# Altium PCB Vertical.PcbDoc
Units mm, origin at the board's own origin, x right, y up, seen from the top; angles counter-clockwise.
Board outline 123.6 x 63.6 mm, 4 copper layers (Top Layer, Internal Plane 1, Internal Plane 2, Bottom Layer), stack 0.462 mm thick; 3 components, 40 nets, 104 pads, 10 vias.
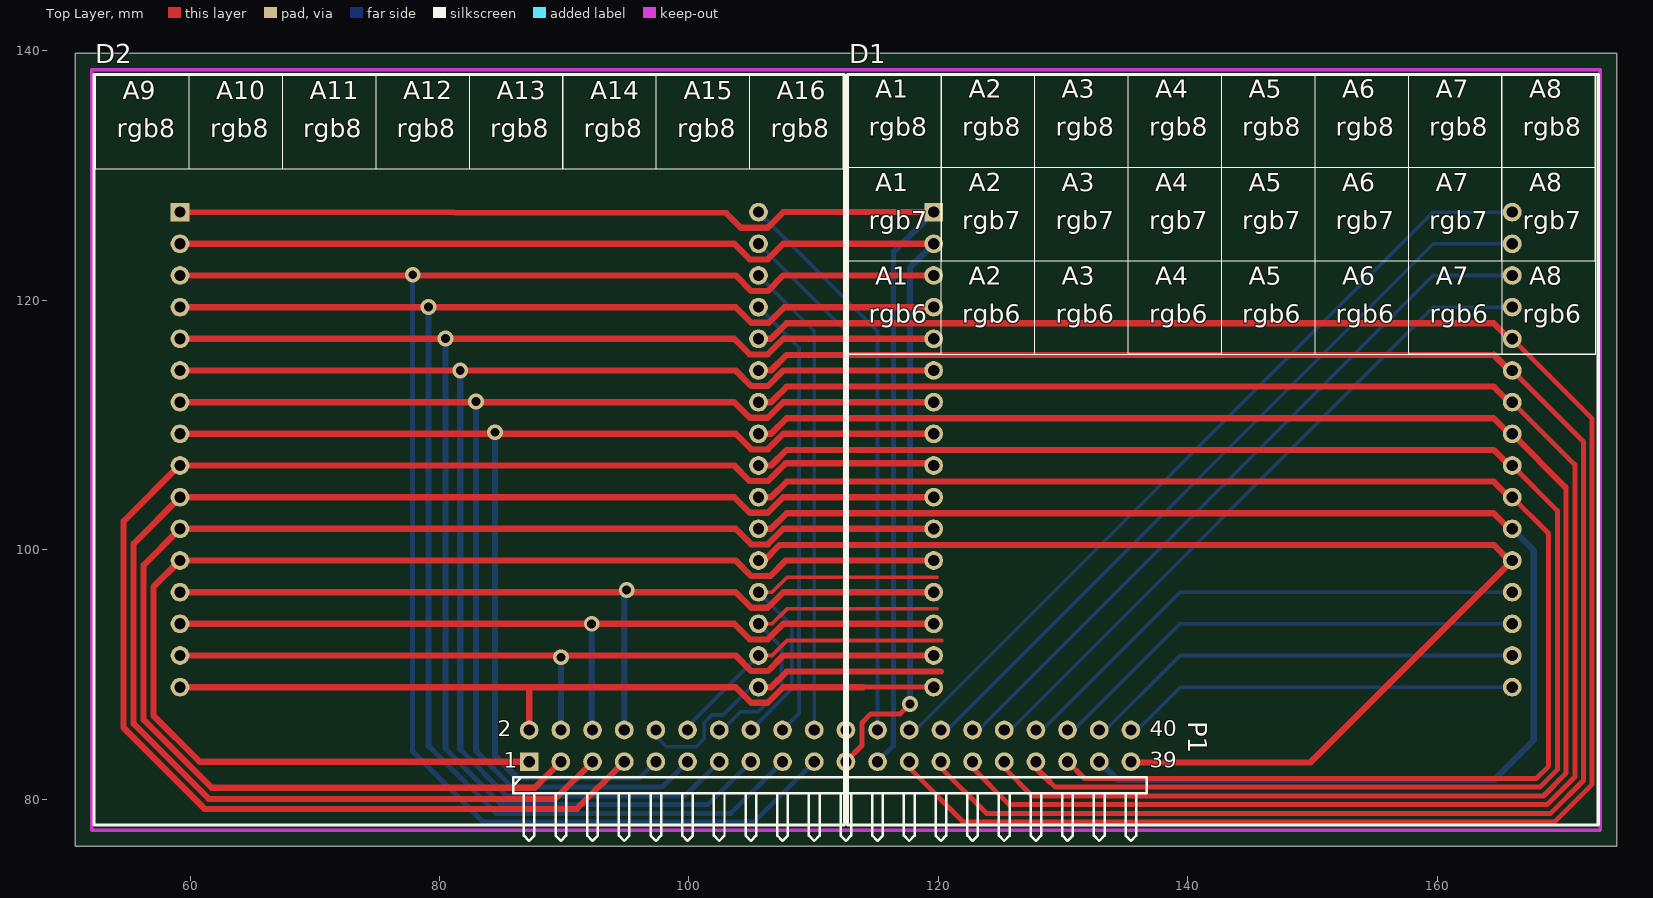
[diagram p0: Top Layer view]
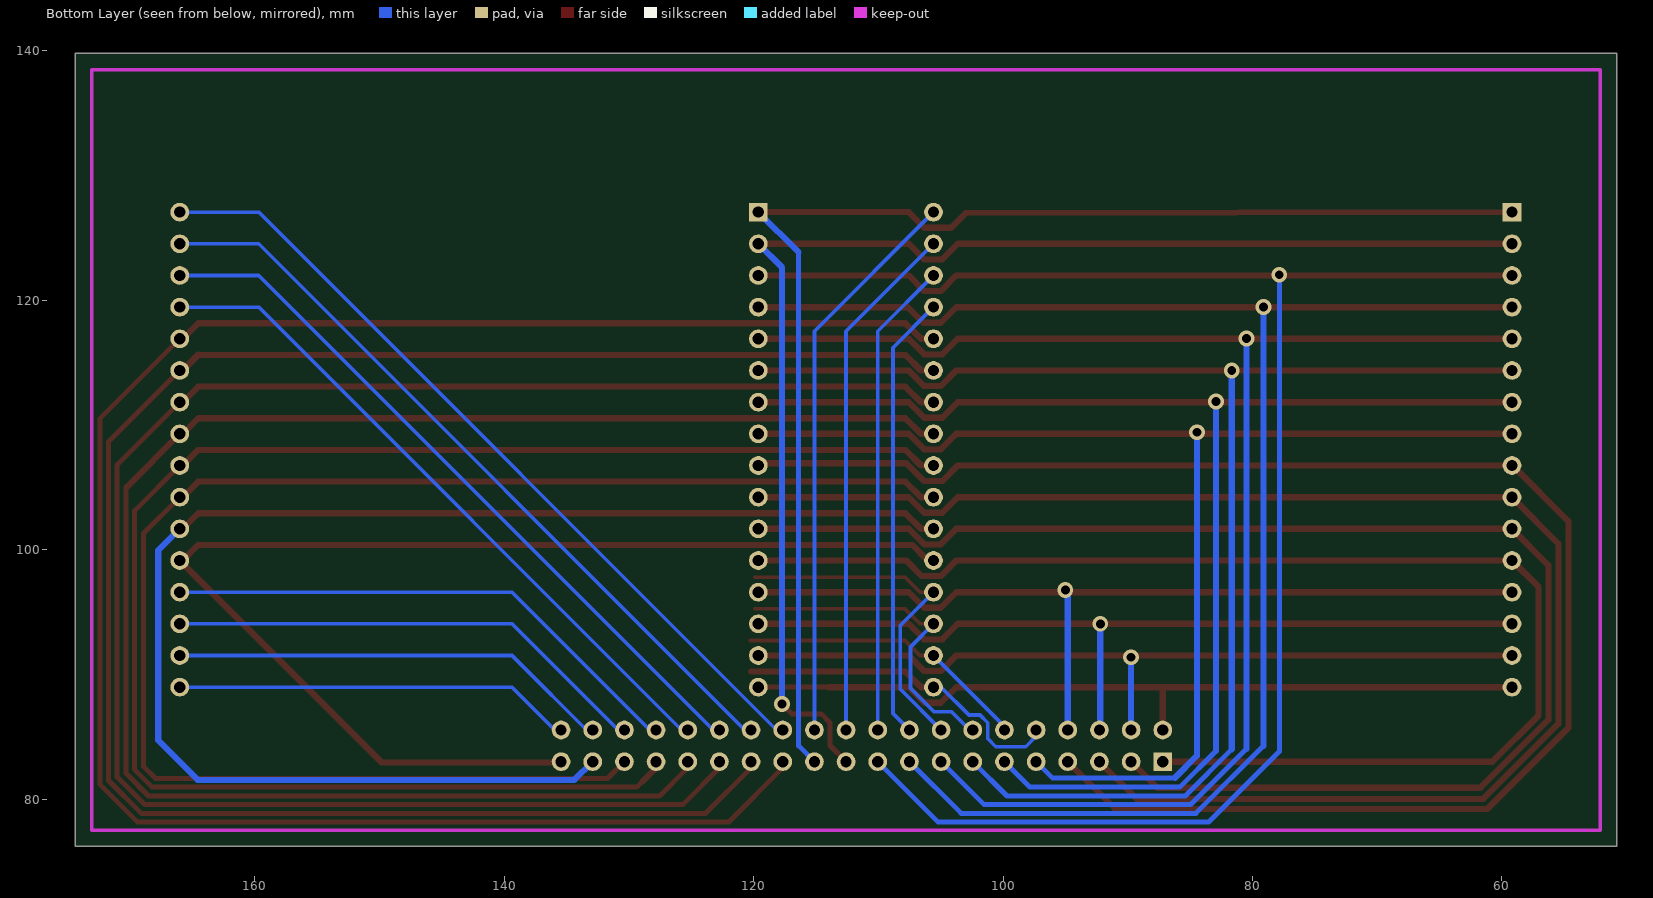
[diagram p1: Bottom Layer view, seen from below]
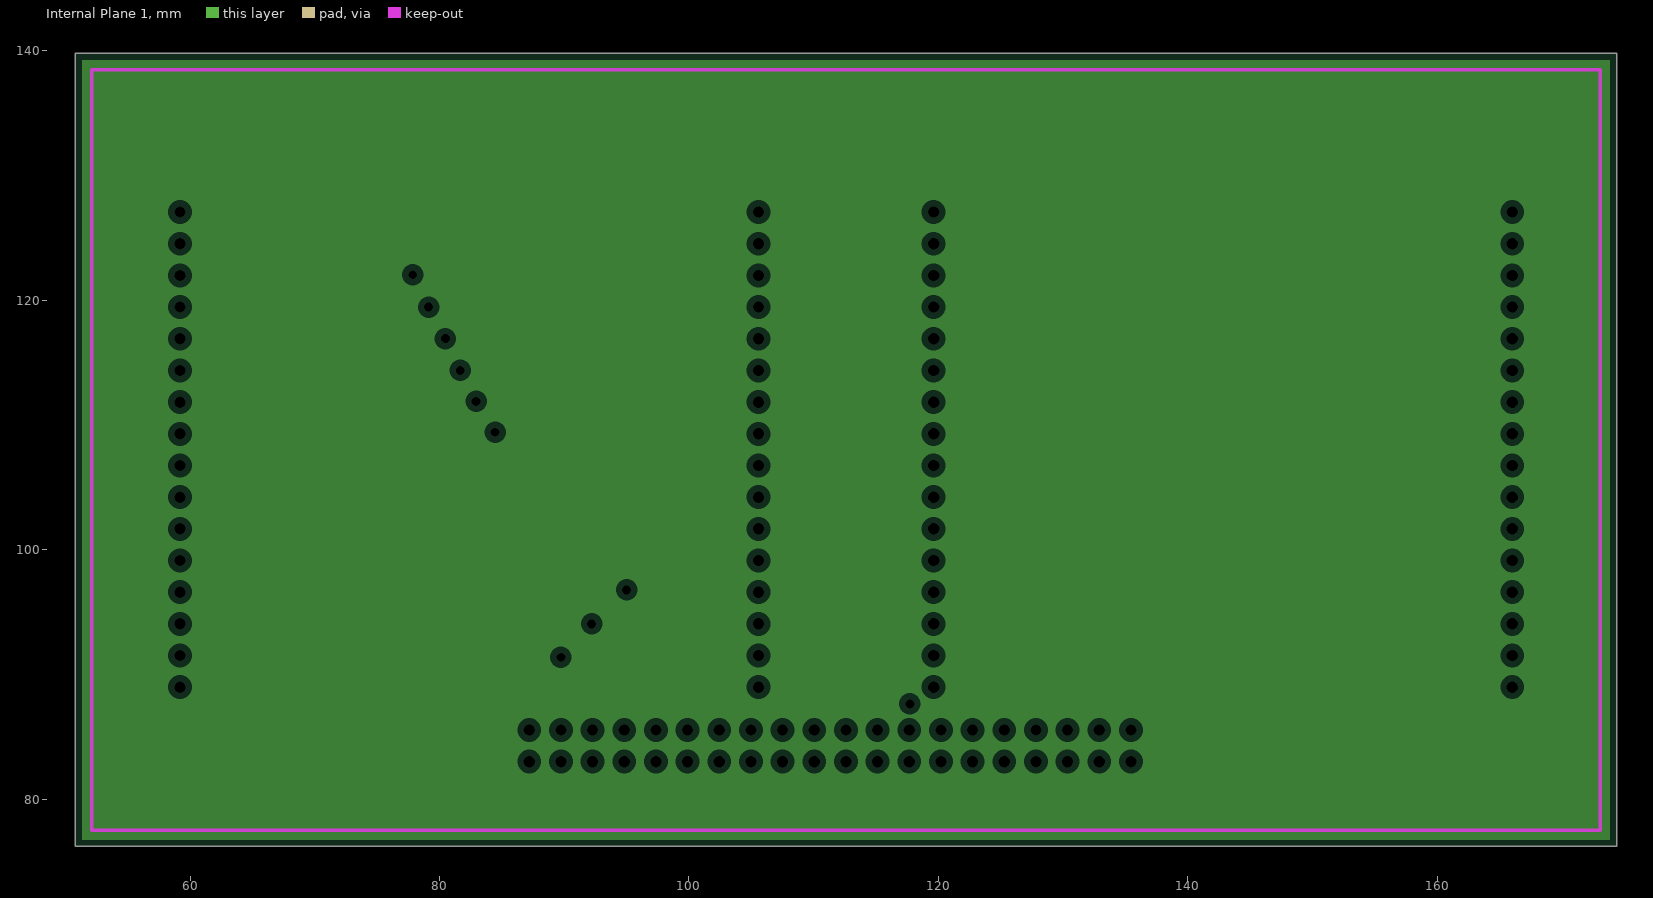
[diagram p2: Internal Plane 1, clearances drawn from the general rule]
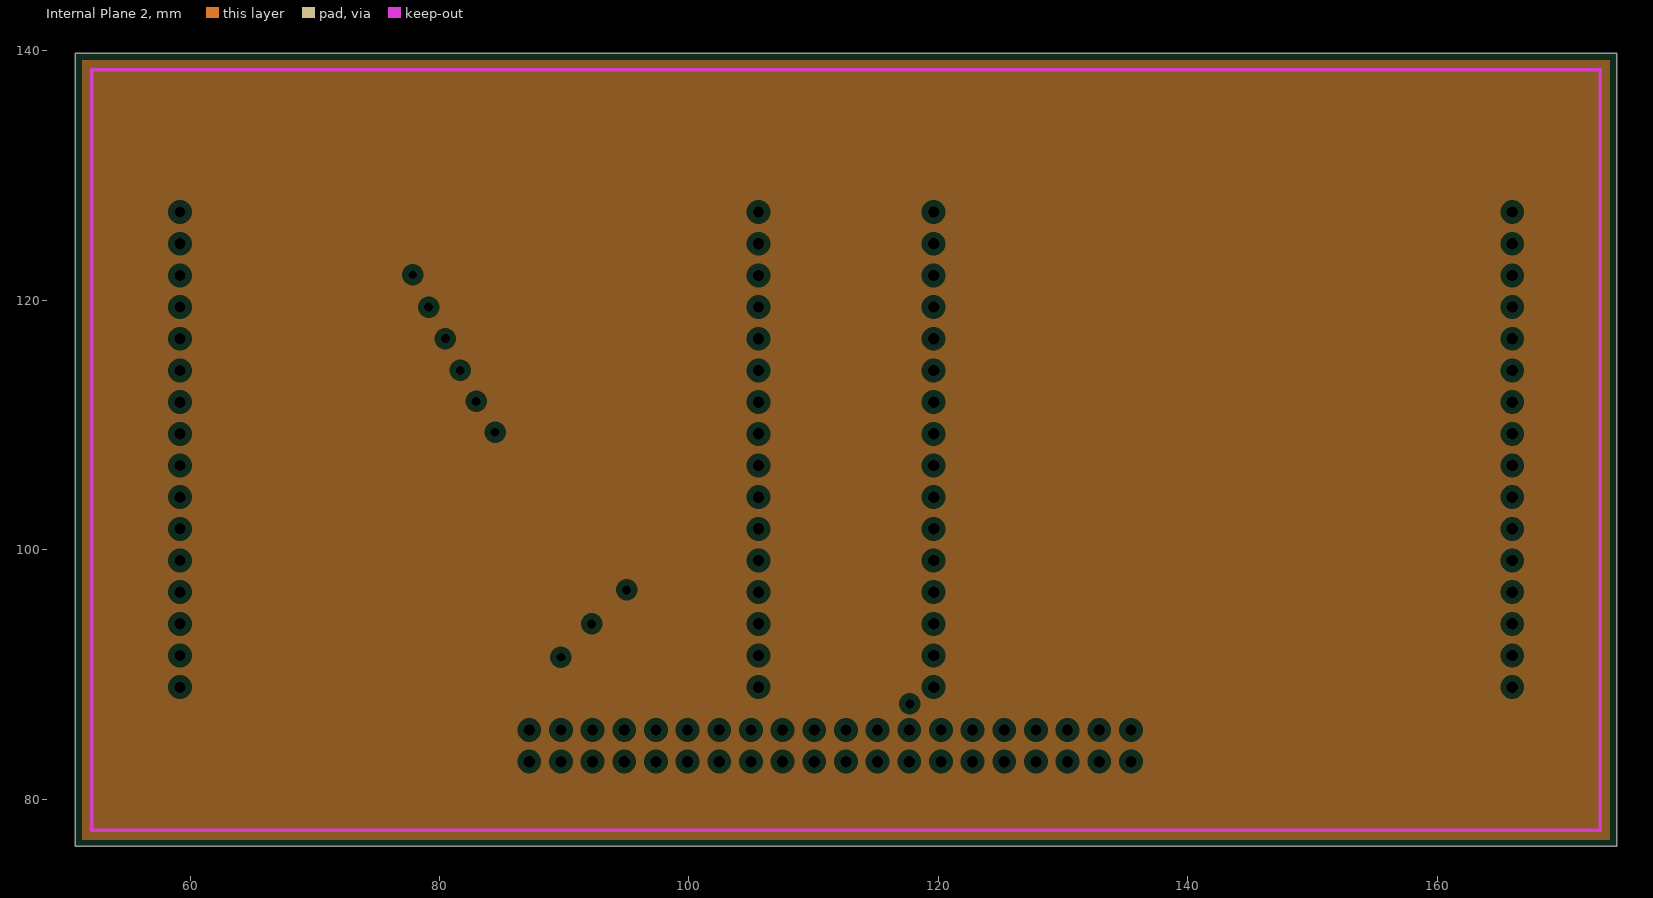
[diagram p3: Internal Plane 2, clearances drawn from the general rule]

## Layer stack, top to bottom
Top Solder: solder mask 0.0102, Solder Resist, Dk 3.5
Top Layer: signal copper 0.0356
Internal Plane 1: plane copper 0.0356
Internal Plane 2: plane copper 0.0356
Dielectric 1: dielectric 0.32, FR-4, Dk 4.8
Bottom Layer: signal copper 0.0356
Bottom Solder: solder mask 0.0102, Solder Resist, Dk 3.5

## Board outline
50.8,76.2 174.4,76.2 174.4,139.8 50.8,139.8

## Design rules (kind name [scope] priority, off if disabled: settings)
Clearance [All] p1: gap=0.3 ignorepadtopadclearanceinfootprint=FALSE except(0: Arc-Hole Track-Hole SMDPad-Hole THPad-Hole Via-Hole Fill-Hole Poly-Hole Region-Hole Text-Hole)
PlaneClearance [All] p1: clearance=0.508
PlaneConnect [All] p1: planeconnectstyle=Relief reliefexpansion=0.508 reliefentries=4 reliefconductorwidth=0.254 reliefairgap=0.254
PolygonConnect [All] p1: connectstyle=Relief reliefconductorwidth=0.254 reliefentries=4 polygonreliefangle="90 Angle" airgapwidth=0.254
RoomDefinition Sheet1 [InComponentClass('Sheet1')] p1: confinementstyle=ConfineIn formatcopy=TRUE lockcomponents=FALSE outline 0,0 50.8,0 50.8,25.4 0,25.4
RoutingVias [All] p1: holewidth=0.8 width=1.6 viastyle="Through Hole" minholewidth=0.711 minwidth=1.27 maxholewidth=0.711 maxwidth=1.27
SolderMaskExpansion [All] p1: expansion=0.102 istentingtop=FALSE
Width [All] p1: maxlimit=1 minlimit=0.3 preferedwidth=0.5
28 further rules are at their usual default settings.

## Components (designator, comment, footprint, x,y, rotation, side; value= is the part's Value field where it differs from the comment)
D1 "Dot_Matrix_RGB" Dot_Matrix_RGB 142.832,108.024 r0 top locked
D2 "Dot_Matrix_RGB" Dot_Matrix_RGB 82.384,108.024 r0 top locked
P1 "Header 20X2H" HDR2X20H 87.192,83 r0 top locked

## Footprints (in the part's own frame and the unit in brackets; to place one, negate y for a bottom-side part, rotate by r counter-clockwise, add the part's x,y. Pads: shape width x height; smd on the part's side, far side on the other; paste and mask are expansions set on the pad)
Dot_Matrix_RGB [mm]
  rect 1.5x1.5 hole 0.9: 1(-23.2,19.05)
  round 1.5 hole 0.9: 2(-23.2,16.51) 3(-23.2,13.97) 4(-23.2,11.43) 5(-23.2,8.89) 6(-23.2,6.35) 7(-23.2,3.81) 8(-23.2,1.27) 9(-23.2,-1.27) 10(-23.2,-3.81) 11(-23.2,-6.35) 12(-23.2,-8.89) 13(-23.2,-11.43) 14(-23.2,-13.97) 15(-23.2,-16.51) 16(-23.2,-19.05) 17(23.2,-19.05) 18(23.2,-16.51) 19(23.2,-13.97) 20(23.2,-11.43) 21(23.2,-8.89) 22(23.2,-6.35) 23(23.2,-3.81) 24(23.2,-1.27) 25(23.2,1.27) 26(23.2,3.81) 27(23.2,6.35) 28(23.2,8.89) 29(23.2,11.43) 30(23.2,13.97) 31(23.2,16.51) 32(23.2,19.05)
  silkscreen extent -30.1,-30.1 30.1,30.1, body extent -30.2,-30 29.8,30, height 7
HDR2X20H [mm] "Connector; Header; 20x2 Position; Right Angle"
  rect 1.5x1.5 hole 0.9: 1(0,0)
  round 1.5 hole 0.9: 2(0,2.54) 3(2.54,0) 4(2.54,2.54) 5(5.08,0) 6(5.08,2.54) 7(7.62,0) 8(7.62,2.54) 9(10.16,0) 10(10.16,2.54) 11(12.7,0) 12(12.7,2.54) 13(15.24,0) 14(15.24,2.54) 15(17.78,0) 16(17.78,2.54) 17(20.32,0) 18(20.32,2.54) 19(22.86,0) 20(22.86,2.54) 21(25.4,0) 22(25.4,2.54) 23(27.94,0) 24(27.94,2.54) 25(30.48,0) 26(30.48,2.54) 27(33.02,0) 28(33.02,2.54) 29(35.56,0) 30(35.56,2.54) 31(38.1,0) 32(38.1,2.54) 33(40.64,0) 34(40.64,2.54) 35(43.18,0) 36(43.18,2.54) 37(45.72,0) 38(45.72,2.54) 39(48.26,0) 40(48.26,2.54)
  silkscreen extent -1.27,-6.35 49.53,-1.27

## Part data
P1: "Header, 20-Pin, Dual row, Right Angle"

## Via types
v1: diameter 1.27, hole 0.711, Top Layer to Bottom Layer, 10 vias

## Nets (pads, with @x,y where several pads share a name; then routed paths per layer and width w, separated by ;. In a path a pad name is that pad's centre, name@x,y a point inside that pad or via, vN(x,y) a via of type N, cw(c..) or ccw(c..) an arc to the next point about the centre after c; other vN are vias at no path point)
A1: D1.32 P1.26 | length 65.8
  Bottom Layer w0.3: P1.26@117.672,85.04 159.706,127.074 D1.32
A2: D1.31 P1.28 | length 62.2
  Bottom Layer w0.3: P1.28@120.212,85.04 159.706,124.534 D1.31
A3: D1.30 P1.30 | length 58.6
  Bottom Layer w0.3: P1.30@122.752,85.04 159.706,121.994 D1.30
A4: D1.29 P1.32 | length 55.2
  Top Layer w0.3: D1.29@165.808,119.454 D1.29 D1.29@166.042,119.454
  Bottom Layer w0.3: P1.32@125.292,85.04 159.706,119.454 D1.29
A5: D1.20 P1.34 | length 43
  Bottom Layer w0.3: P1.34@127.832,85.04 139.386,96.594 D1.20
A6: D1.19 P1.36 | length 39.4
  Bottom Layer w0.3: P1.36@130.372,85.04 139.386,94.054 D1.19
A7: D1.18 P1.38 | length 35.8
  Bottom Layer w0.3: P1.38@132.912,85.04 139.386,91.514 D1.18
A8: D1.17 P1.40 | length 32.2
  Bottom Layer w0.3: P1.40@135.452,85.04 139.386,88.974 D1.17
A9: D2.32 P1.24 | length 46
  Bottom Layer w0.3: D2.32 115.132,117.526 P1.24@115.132,85.04
A10: D2.31 P1.22 | length 42.4
  Bottom Layer w0.3: D2.31 112.592,117.526 P1.22@112.592,85.04
A11: D2.30 P1.20 | length 38.8
  Bottom Layer w0.3: D2.30 110.052,117.526 P1.20@110.052,85.04
A12: D2.29 P1.18 | length 36.3
  Bottom Layer w0.3: D2.29 108.839,116.199 108.839,86.868 107.512,85.541 P1.18@107.512,85.04
A13: D2.20 P1.16 | length 28.6
  Top Layer w0.3: D2.20@105.808,96.594 106.657,96.594 107.857,97.794 119.905,97.794
  Bottom Layer w0.3: P1.16@104.972,85.04 104.972,85.541 108.239,88.808 108.239,93.939 D2.20
A14: D2.19 P1.14 | length 27.3
  Top Layer w0.3: D2.19@105.808,94.054 106.657,94.054 107.857,95.254 119.905,95.254
  Bottom Layer w0.3: P1.14@102.432,85.04 102.432,85.287 104.14,86.995 105.537,86.995 107.436,88.894 107.436,92.202 D2.19
A15: D2.18 P1.12 | length 23.8
  Top Layer w0.3: D2.18@105.808,91.514 106.657,91.514 107.857,92.714 120.265,92.714
  Bottom Layer w0.3: P1.12@99.892,85.04 99.892,85.822 D2.18
A16: D2.17 P1.10 | length 26.7
  Top Layer w0.5: D2.17@105.808,88.974 106.586,88.974 107.836,90.224 120.215,90.224
  Bottom Layer w0.3: P1.10@97.352,85.04 98.191,84.201 100.584,84.201 101.232,84.849 101.232,86.119 101.853,86.74 102.742,86.74 104.976,88.974 D2.17
  Bottom Layer w0.4: D2.17@105.808,88.536 D2.17@105.808,88.974
B1: D1.8 D2.8 P1.9 | length 101.3
  Top Layer w0.5: D2.8@59.408,109.294 v1@84.582,109.294 ; v1(84.455,109.421) v1@84.582,109.294 ; D1.8@119.408,109.294 107.576,109.294 106.326,108.044 105.009,108.044 103.759,109.294 v1@84.582,109.294
  Bottom Layer w0.4: 86.214,81.7 96.052,81.7 P1.9
  Bottom Layer w0.5: v1(84.455,109.421) 84.455,83.459 86.214,81.7
B2: D1.7 D2.7 P1.11 | length 108.3
  Top Layer w0.5: D2.7@59.408,111.834 103.632,111.834 104.882,110.584 106.326,110.584 107.576,111.834 D1.7@119.408,111.834
  Bottom Layer w0.4: 82.931,83.852 85.833,80.95 97.842,80.95 P1.11
  Bottom Layer w0.5: 82.931,83.852 82.931,111.76 82.804,111.887 v1(82.931,111.887)
B3: D1.6 D2.6 P1.13 | length 114.9
  Top Layer w0.5: D2.6@59.408,114.374 v1(81.661,114.374) 103.759,114.374 105.009,113.124 106.326,113.124 107.576,114.374 D1.6@119.408,114.374
  Bottom Layer w0.4: 81.661,83.99 85.401,80.25 99.682,80.25 P1.13
  Bottom Layer w0.5: 81.661,83.99 v1(81.661,114.374)
B4: D1.5 D2.5 P1.15 | length 121.7
  Top Layer w0.5: D2.5@59.408,116.914 v1@80.487,116.914 ; v1(80.476,116.925) v1@80.487,116.914 ; D1.5@119.408,116.914 107.576,116.914 106.326,115.664 104.882,115.664 103.632,116.914 v1@80.487,116.914
  Bottom Layer w0.4: 80.476,84.044 84.97,79.55 101.522,79.55 P1.15
  Bottom Layer w0.5: 80.476,84.044 v1(80.476,116.925)
B5: D1.4 D2.4 P1.17 | length 128.8
  Top Layer w0.5: D2.4@59.408,119.454 v1(79.121,119.454) 103.759,119.454 105.009,118.204 106.393,118.204 107.643,119.454 D1.4@119.408,119.454
  Bottom Layer w0.4: 79.121,84.268 84.539,78.85 103.362,78.85 P1.17
  Bottom Layer w0.5: 79.121,84.268 v1(79.121,119.454) v1@79.121,119.634
B6: D1.3 D2.3 P1.19 | length 135.8
  Top Layer w0.5: D2.3@59.408,121.994 103.759,121.994 105.009,120.744 106.326,120.744 107.576,121.994 D1.3@119.408,121.994
  Bottom Layer w0.4: v1(77.851,122.047) 77.851,83.82 83.521,78.15 105.202,78.15 P1.19
B7: D1.2 D2.2 P1.21 | length 106.9
  Top Layer w0.4: P1.21 113.882,84.29 113.882,86.128 114.594,86.84 116.939,86.84 v1(117.729,87.63)
  Top Layer w0.5: D2.2@59.408,124.534 103.632,124.534 104.882,123.284 106.326,123.284 107.576,124.534 D1.2@119.408,124.534
  Bottom Layer w0.5: v1(117.729,87.63) 117.729,122.631 D1.2
B8: D1.1 D2.1 P1.23 | length 106.9
  Top Layer w0.5: D2.1@59.408,127.074 102.997,127.001 104.174,125.824 106.326,125.824 107.576,127.074 D1.1@119.408,127.074
  Bottom Layer w0.4: P1.23 116.402,84.27 116.402,123.844
  Bottom Layer w0.5: 116.402,123.844 D1.1
G1: D1.21 D2.21 P1.39 | length 98.5
  Top Layer w0.4: D2.21@105.808,99.134 D2.21@106.026,99.134
  Top Layer w0.5: D2.21@106.026,99.134 107.276,100.384 164.558,100.384 D1.21@165.808,99.134 ; P1.39@135.452,82.5 135.883,82.931 149.829,82.931 D1.21
G2: D1.22 D2.22 P1.37 | length 115.5
  Top Layer w0.5: D2.22@105.808,101.674 106.586,101.674 107.836,102.924 164.558,102.924 D1.22@165.808,101.674
  Bottom Layer w0.5: P1.37 134.378,81.534 164.592,81.534 167.767,84.709 167.767,99.939 D1.22
G3: D1.23 D2.23 P1.35 | length 123.4
  Top Layer w0.4: P1.35 131.722,81.65 167.956,81.65 168.95,82.644 168.95,101.296 D1.23
  Top Layer w0.5: D2.23@105.808,104.214 106.586,104.214 107.836,105.464 164.558,105.464 D1.23@165.808,104.214
G4: D1.24 D2.24 P1.33 | length 130
  Top Layer w0.4: 128.905,81.427 129.382,80.95 168.246,80.95 169.65,82.354 169.65,103.136 D1.24
  Top Layer w0.5: D2.24@105.808,106.754 106.586,106.754 107.836,108.004 164.558,108.004 D1.24@165.808,106.754 ; P1.33@127.832,82.5 128.905,81.427
G5: D1.25 D2.25 P1.31 | length 136.7
  Top Layer w0.4: P1.31@125.292,82.5 127.542,80.25 168.536,80.25 170.35,82.064 170.35,104.902
  Top Layer w0.5: D2.25@105.808,109.294 106.586,109.294 107.836,110.544 164.558,110.544 D1.25@165.808,109.294 ; D1.25 170.3,105.026
G6: D1.26 D2.26 P1.29 | length 143.6
  Top Layer w0.4: P1.29@122.752,82.5 125.702,79.55 168.826,79.55 171.05,81.774 171.05,106.816 D1.26
  Top Layer w0.5: D2.26@105.808,111.834 106.586,111.834 107.836,113.084 164.558,113.084 D1.26@165.808,111.834
G7: D1.27 D2.27 P1.27 | length 150.4
  Top Layer w0.4: P1.27@120.212,82.5 123.862,78.85 169.116,78.85 171.75,81.484 171.75,108.656 D1.27
  Top Layer w0.5: D2.27@105.808,114.374 106.586,114.374 107.836,115.624 164.558,115.624
  Top Layer w0.55: 164.558,115.624 D1.27@165.808,114.374
G8: D1.28 D2.28 P1.25 | length 157.3
  Top Layer w0.4: P1.25@117.672,82.5 122.022,78.15 169.406,78.15 172.45,81.194 172.45,110.496 D1.28
  Top Layer w0.5: D2.28@105.808,116.914 106.586,116.914 107.836,118.164 164.558,118.164 D1.28@165.808,116.914
R1: D1.16 D2.16 P1.2 | length 64.5
  Top Layer w0.4: 113.986,88.974 D1.16@119.408,88.974
  Top Layer w0.5: D2.16@59.408,88.974 87.122,88.974 ; P1.2 87.192,88.904 87.122,88.974 ; 113.986,88.974 107.576,88.974 106.326,87.724 105.009,87.724 103.759,88.974 87.122,88.974
R2: D1.15 D2.15 P1.4 | length 66.9
  Top Layer w0.5: D2.15@59.408,91.514 v1@89.662,91.514 ; v1@89.662,91.44 v1(89.732,91.37) ; v1@89.732,91.514 103.759,91.514 105.009,90.264 106.326,90.264 107.576,91.514 D1.15@119.408,91.514
  Bottom Layer w0.5: P1.4 v1(89.732,91.37)
R3: D1.14 D2.14 P1.6 | length 69.6
  Top Layer w0.5: D2.14@59.408,94.054 v1(92.202,94.054) 103.632,94.054 104.882,92.804 106.326,92.804 107.576,94.054 D1.14@119.408,94.054
  Bottom Layer w0.5: v1(92.202,94.054) 92.202,85.61 P1.6
R4: D1.13 D2.13 P1.8 | length 72.4
  Top Layer w0.5: D2.13@59.408,96.594 103.759,96.594 105.009,95.344 106.326,95.344 107.576,96.594 D1.13@119.408,96.594
  Bottom Layer w0.5: P1.8 94.812,96.577 v1(95.009,96.774)
R5: D1.12 D2.12 P1.1 | length 106.4
  Top Layer w0.3: D1.12@119.609,98.933 D1.12@119.863,99.187
  Top Layer w0.5: D2.12 57.061,97.011 57.061,86.691 60.752,83 P1.1 ; D2.12@59.408,99.134 103.759,99.134 105.009,97.884 106.52,97.884 107.77,99.134 D1.12@119.408,99.134
R6: D1.11 D2.11 P1.3 | length 114.2
  Top Layer w0.5: D2.11 56.261,98.751 56.261,86.36 61.722,80.899 87.631,80.899 P1.3 ; D2.11@59.408,101.674 103.759,101.674 105.009,100.424 106.326,100.424 107.576,101.674 D1.11@119.408,101.674
R7: D1.10 D2.10 P1.5 | length 121.3
  Top Layer w0.5: D2.10 55.461,100.491 55.461,86.029 61.48,80.01 89.282,80.01 P1.5 ; D2.10@59.408,104.214 103.632,104.214 104.882,102.964 106.326,102.964 107.576,104.214 D1.10@119.408,104.214
R8: D1.9 D2.9 P1.7 | length 128.8
  Top Layer w0.4: D1.9@119.228,106.934 D1.9@119.408,106.754
  Top Layer w0.5: P1.7 91.022,79.21 61.148,79.21 54.661,85.697 54.661,102.286 59.129,106.754 103.632,106.754 104.882,105.504 106.326,105.504 107.756,106.934 D1.9@119.228,106.934

## Keep-outs
Keep-Out Layer:
  lines w0.3: 52.1,77.5 52.1,138.5 173.1,138.5 173.1,77.5 52.1,77.5

## Silkscreen, mask and mechanical layers (free items; w line width, h text height)
Top Overlay:
  lines w0.1: 52.436,130.555 59.936,130.555 ; 59.929,130.555 67.429,130.555 ; 67.422,130.555 74.922,130.555 ; 74.915,130.555 82.415,130.555 ; 82.408,130.555 89.908,130.555 ; 89.901,130.555 97.401,130.555 ; 97.394,130.555 104.894,130.555 ; 104.887,130.555 112.387,130.555 ; 112.38,130.548 112.38,138.048 ; 112.761,115.689 120.261,115.689 ; 112.761,115.696 120.261,115.696 ; 135.24,115.696 142.74,115.696 ; 135.24,123.189 135.24,115.689 142.74,115.689 142.74,123.189 ; 157.719,123.189 165.219,123.189 ; 157.734,115.689 165.234,115.689 165.234,123.189 157.734,123.189 ; 157.734,115.696 165.234,115.696 ; 165.227,115.696 172.727,115.696 ; 172.705,123.182 172.705,130.682 ; 172.705,130.675 172.705,138.175 ; 97.401,130.548 97.401,138.048 ; 97.401,130.548 89.901,130.548 89.901,138.048 97.401,138.048 ; 97.401,130.548 97.401,138.048 ; 135.247,115.689 135.247,123.189 ; 135.247,115.689 127.747,115.689 127.747,123.189 135.247,123.189 ; 135.247,115.689 135.247,123.189 ; 157.726,123.182 157.726,130.682 ; 157.726,123.182 150.226,123.182 150.226,130.682 157.726,130.682 ; 157.726,123.182 157.726,130.682 ; 157.726,130.675 157.726,138.175 ; 157.726,130.675 150.226,130.675 150.226,138.175 157.726,138.175 ; 157.726,130.675 157.726,138.175 ; 52.436,130.548 52.436,138.048 59.936,138.048 59.936,130.548 52.436,130.548 ; 59.929,130.548 59.929,138.048 67.429,138.048 67.429,130.548 59.929,130.548 ; 67.422,130.548 67.422,138.048 74.922,138.048 74.922,130.548 67.422,130.548 ; 74.915,130.548 74.915,138.048 82.415,138.048 82.415,130.548 74.915,130.548 ; 82.408,130.548 82.408,138.048 89.908,138.048 89.908,130.548 82.408,130.548 ; 97.394,130.548 104.894,130.548 104.894,138.048 97.394,138.048 97.394,130.548 ; 104.887,130.548 112.387,130.548 112.387,138.048 104.887,138.048 104.887,130.548 ; 112.761,123.182 120.261,123.182 120.261,130.682 112.761,130.682 112.761,123.182 ; 112.761,130.675 120.261,130.675 120.261,138.175 112.761,138.175 112.761,130.675 ; 120.254,115.689 127.754,115.689 127.754,123.189 120.254,123.189 120.254,115.689 ; 120.254,123.182 127.754,123.182 127.754,130.682 120.254,130.682 120.254,123.182 ; 120.254,130.675 127.754,130.675 127.754,138.175 120.254,138.175 120.254,130.675 ; 127.747,123.182 135.247,123.182 135.247,130.682 127.747,130.682 127.747,123.182 ; 127.747,130.675 135.247,130.675 135.247,138.175 127.747,138.175 127.747,130.675 ; 135.24,123.182 142.74,123.182 142.74,130.682 135.24,130.682 135.24,123.182 ; 135.24,130.675 142.74,130.675 142.74,138.175 135.24,138.175 135.24,130.675 ; 142.733,115.689 150.233,115.689 150.233,123.189 142.733,123.189 142.733,115.689 ; 142.733,123.182 150.233,123.182 150.233,130.682 142.733,130.682 142.733,123.182 ; 142.733,130.675 150.233,130.675 150.233,138.175 142.733,138.175 142.733,130.675 ; 150.226,115.689 157.726,115.689 157.726,123.189 150.226,123.189 150.226,115.689 ; 157.719,123.182 157.719,130.682 165.219,130.682 165.219,123.182 157.719,123.182 ; 157.719,130.675 157.719,138.175 165.219,138.175 165.219,130.675 157.719,130.675 ; 165.212,123.182 165.212,130.682 172.712,130.682 172.712,123.182 165.212,123.182 ; 165.212,130.675 165.212,138.175 172.712,138.175 172.712,130.675 165.212,130.675 ; 165.227,115.689 165.227,123.189 172.727,123.189 172.727,115.689 165.227,115.689
  text "A1" at 114.935,135.763 h2.5
  text "A2" at 122.428,135.763 h2.5
  text "A3" at 129.921,135.763 h2.5
  text "A4" at 137.414,135.763 h2.5
  text "A5" at 144.907,135.763 h2.5
  text "A6" at 152.4,135.763 h2.5
  text "A7" at 159.893,135.763 h2.5
  text "A8" at 167.386,135.763 h2.5
  text "A9" at 54.61,135.636 h2.5
  text "A10" at 62.103,135.636 h2.5
  text "A11" at 69.596,135.636 h2.5
  text "A12" at 77.089,135.636 h2.5
  text "A13" at 84.582,135.636 h2.5
  text "A14" at 92.075,135.636 h2.5
  text "A15" at 99.568,135.636 h2.5
  text "A16" at 107.061,135.636 h2.5
  text "rgb8" at 114.427,132.715 h2.5
  text "rgb8" at 121.92,132.715 h2.5
  text "rgb8" at 129.413,132.715 h2.5
  text "rgb8" at 136.906,132.715 h2.5
  text "rgb8" at 144.399,132.715 h2.5
  text "rgb8" at 151.892,132.715 h2.5
  text "rgb8" at 159.385,132.715 h2.5
  text "rgb8" at 166.878,132.715 h2.5
  text "rgb8" at 54.102,132.588 h2.5
  text "rgb8" at 61.595,132.588 h2.5
  text "rgb8" at 69.088,132.588 h2.5
  text "rgb8" at 76.581,132.588 h2.5
  text "rgb8" at 84.074,132.588 h2.5
  text "rgb8" at 91.567,132.588 h2.5
  text "rgb8" at 99.06,132.588 h2.5
  text "rgb8" at 106.553,132.588 h2.5
  text "A1" at 114.935,128.27 h2.5
  text "A2" at 122.428,128.27 h2.5
  text "A3" at 129.921,128.27 h2.5
  text "A4" at 137.414,128.27 h2.5
  text "A5" at 144.907,128.27 h2.5
  text "A6" at 152.4,128.27 h2.5
  text "A7" at 159.893,128.27 h2.5
  text "A8" at 167.386,128.27 h2.5
  text "rgb7" at 114.427,125.222 h2.5
  text "rgb7" at 121.92,125.222 h2.5
  text "rgb7" at 129.413,125.222 h2.5
  text "rgb7" at 136.906,125.222 h2.5
  text "rgb7" at 144.399,125.222 h2.5
  text "rgb7" at 151.892,125.222 h2.5
  text "rgb7" at 159.385,125.222 h2.5
  text "rgb7" at 166.878,125.222 h2.5
  text "A1" at 114.935,120.777 h2.5
  text "A2" at 122.428,120.777 h2.5
  text "A3" at 129.921,120.777 h2.5
  text "A4" at 137.414,120.777 h2.5
  text "A5" at 144.907,120.777 h2.5
  text "A6" at 152.4,120.777 h2.5
  text "A7" at 159.908,120.777 h2.5
  text "A8" at 167.401,120.777 h2.5
  text "rgb6" at 114.427,117.729 h2.5
  text "rgb6" at 121.92,117.729 h2.5
  text "rgb6" at 129.413,117.729 h2.5
  text "rgb6" at 136.906,117.729 h2.5
  text "rgb6" at 144.399,117.729 h2.5
  text "rgb6" at 151.892,117.729 h2.5
  text "rgb6" at 159.4,117.729 h2.5
  text "rgb6" at 166.893,117.729 h2.5
Drill Drawing:
  text ".LEGEND" at 179.48,81.28 h1.52
  text "Drill Drawing." at 179.48,78.74 h1.52

## Dimensions
52.1,77.5 to 52.1,138.5 on Mechanical 1
52.1,77.5 to 173.1,77.5 on Mechanical 1

## Text inside footprints (layer, text, board x,y; h text height)
P1: Top Overlay "2" at 84.652,85.032 h1.27; Top Overlay "1" at 85.16,82.492 h1.27; Top Overlay "39" at 136.976,82.492 h1.27; Top Overlay "40" at 136.976,85.032 h1.27